# Altium PCB Buttons.PcbDoc
Units mm, origin at the board's own origin, x right, y up, seen from the top; angles counter-clockwise.
Board outline 72.34 x 20.68 mm, 2 copper layers (Top Layer, Bottom Layer); 13 components, 6 nets, 38 pads, 0 vias.
Unrouted connection lines stored in the file: 2.
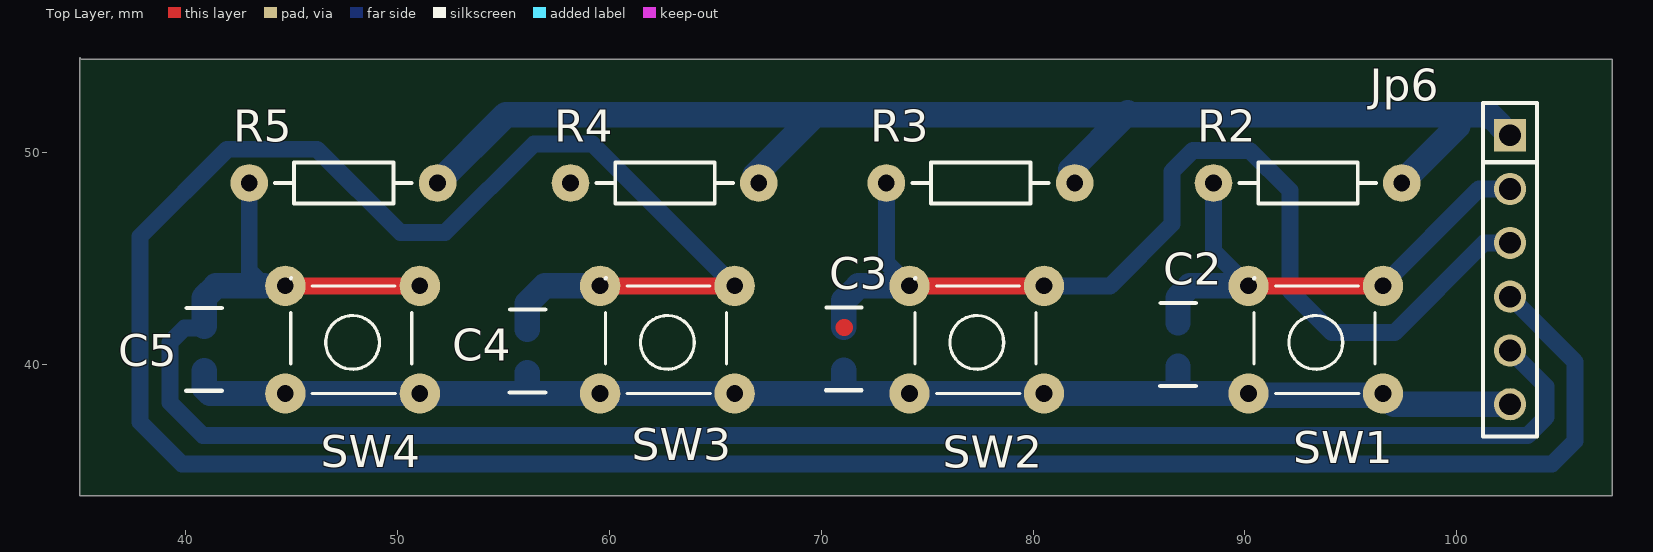
[diagram p0: Top Layer view]
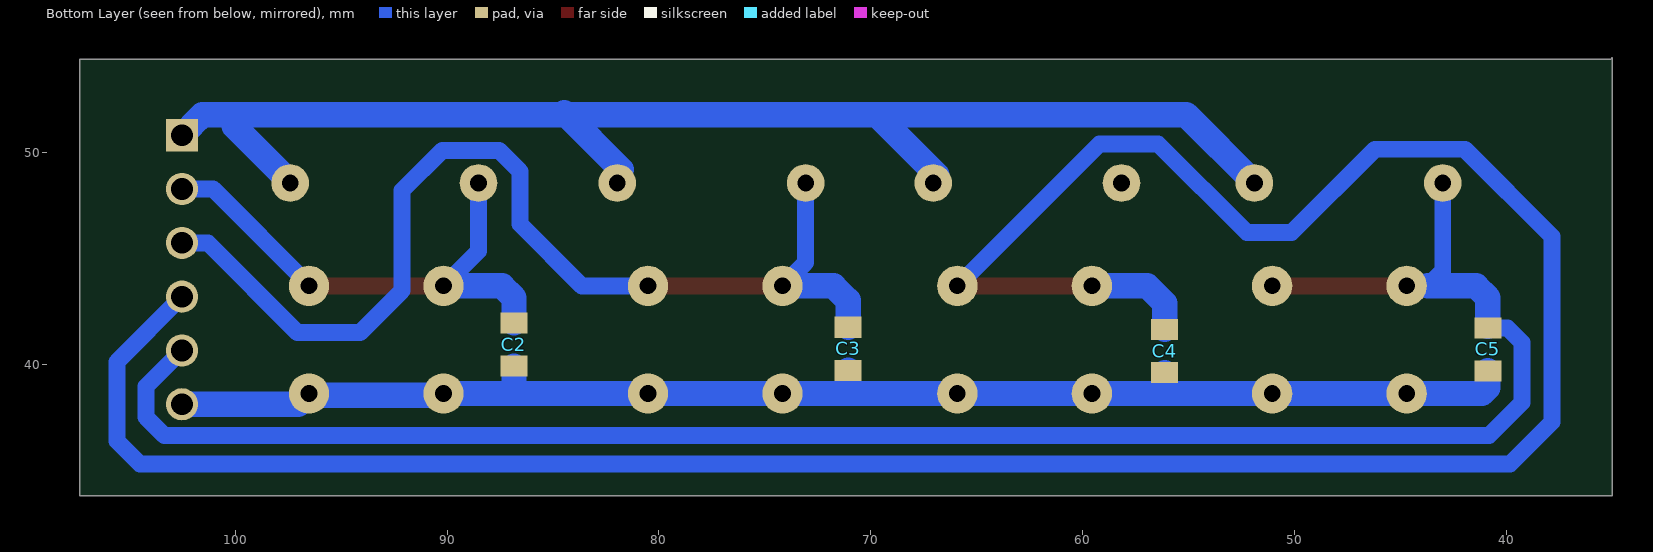
[diagram p1: Bottom Layer view, seen from below]
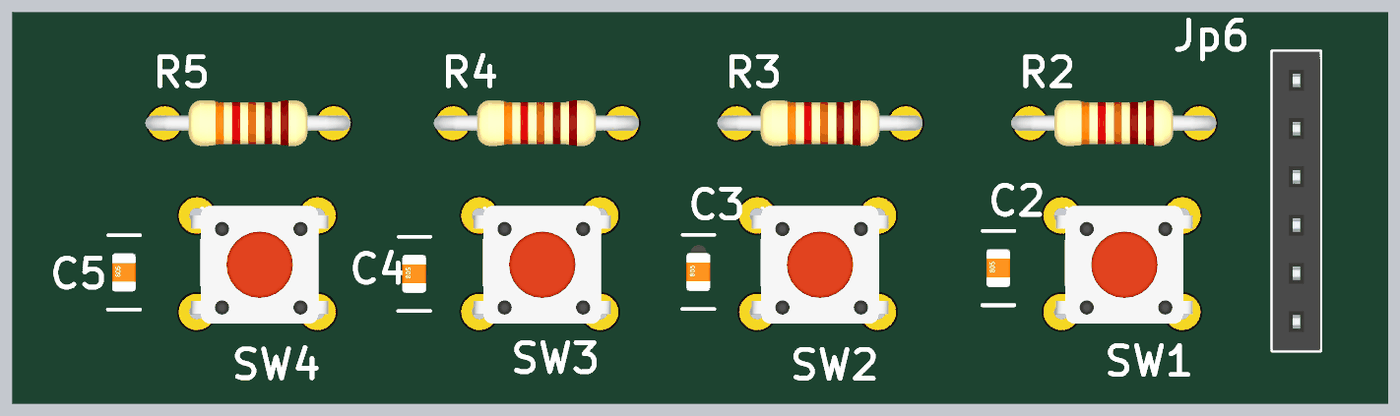
[diagram p2: 3D render of the assembled board from above, using the file's embedded part models]

## Layer stack, top to bottom
Top Solder: solder mask 0.0102, Solder Resist, Dk 3.5
Top Layer: signal copper 0.0356
Dielectric 1: dielectric 0.32, FR-4, Dk 4.8
Bottom Layer: signal copper 0.0356
Bottom Solder: solder mask 0.0102, Solder Resist, Dk 3.5

## Board outline
35.001,54.458 35.077,54.381 107.34,54.381 107.34,33.782 35.001,33.782

## Design rules (kind name [scope] priority, off if disabled: settings)
Clearance [All] p1: gap=0.254
PolygonConnect [All] p1: connectstyle=Relief reliefconductorwidth=0.254 reliefentries=4 polygonreliefangle="90 Angle" airgapwidth=0.254
RoutingVias [All] p1: holewidth=0.711 width=1.27 viastyle="Through Hole" minholewidth=0.711 minwidth=1.27 maxholewidth=0.711 maxwidth=1.27
SolderMaskExpansion [All] p1: expansion=0.102
Width [All] p1: maxlimit=1.2 minlimit=0.6 preferedwidth=0.8
30 further rules are at their usual default settings.

## Components (designator, comment, footprint, x,y, rotation, side; value= is the part's Value field where it differs from the comment)
C2 "Capacitor Ceramic" C0805 86.843,40.919 r90 top
C3 "Capacitor Ceramic" C0805 71.069,40.716 r90 top
C4 "Capacitor Ceramic" C0805 56.134,40.615 r90 top
C5 "Capacitor Ceramic" C0805 40.869,40.691 r90 top
Jp6 "JP6" JP6-C1T 102.514,50.8 r270 top
R2 "1k" R1/4W 88.519,48.547 r0 top
R3 "1k" R1/4W 73.076,48.547 r0 top
R4 "1k" R1/4W 58.166,48.547 r0 top
R5 "1k" R1/4W 43.002,48.547 r0 top
SW1 "SW" SW4 96.52,38.608 r180 top
SW2 "SW" SW4 80.518,38.608 r180 top
SW3 "SW" SW4 65.913,38.608 r180 top
SW4 "SW" SW4 51.054,38.608 r180 top

## Footprints (in the part's own frame and the unit in brackets; to place one, negate y for a bottom-side part, rotate by r counter-clockwise, add the part's x,y. Pads: shape width x height; smd on the part's side, far side on the other; paste and mask are expansions set on the pad)
C0805 [mm] "Chip Resistor; Body 2.0 x 1.3 mm (LxW typ)"
  rect 1x1.27 smd far side: 1(-1.016,0) 2(1.016,0)
  silkscreen extent -1.96,-0.84 1.96,0.84, body extent -1,-0.62 1,0.63, height 0.78
JP6-C1T [mm] "6 row, straight, gold plating"
  rect 1.52x1.52 hole 1.02: 1(0,0)
  round 1.52 hole 1.02: 2(2.54,0) 3(5.08,0) 4(7.62,0) 5(10.16,0) 6(12.7,0)
  silkscreen extent -1.52,-1.27 14.22,1.27, body extent -1.52,-1.25 14.22,1.25, height 8.51
R1/4W [mil] "R 1/4W, 2 Pin, 350mil"
  round 70 hole 31: 1(0,0) 2(350,0)
  silkscreen extent 48,-38 302,38, body extent -40,-47 386,47, height 111
SW4 [mil] "SW button 4pin, 250 x250 mil"
  round 75 hole 31: 1(0,0) 2(250,-200) 3(250,0) 4(0,-200)
  silkscreen extent 15,-215 240,0, body extent -36,-220 276,24, height 276

## Part data
C2 C3 C4 C5: library part CapSMD, "Capacitor"
Jp6: "WR-PHD 2.54 mm Angled Socket Header"
R2 R3 R4 R5: library part R1/4W, "Resistor 1/4W"
SW1 SW2 SW3 SW4: library part SW4, "Switch button 4 pin"

## Nets (pads, with @x,y where several pads share a name; then routed paths per layer and width w, separated by ;. In a path a pad name is that pad's centre, name@x,y a point inside that pad or via, vN(x,y) a via of type N, cw(c..) or ccw(c..) an arc to the next point about the centre after c; other vN are vias at no path point)
GND: C2.1 C3.1 C4.1 C5.1 Jp6.6 SW1.1 SW1.3 SW2.1 SW2.3 SW3.1 SW3.3 SW4.1 SW4.3 | length 65.8
  Bottom Layer w1.2: C5.1 40.869,38.887 41.148,38.608 SW4.3 SW4.1 SW3.3 SW3.1 70.942,38.608 ; 56.134,38.76 C4.1 ; C3.1 71.069,38.735 70.942,38.608 ; C2.1 86.843,38.684 86.766,38.608 ; SW1.3 86.766,38.608 ; SW1.3@90.475,38.532 96.825,38.532 97.028,38.1 Jp6.6 ; 70.942,38.608 SW2.3 SW2.1 86.766,38.608
NetC2_2: C2.2 Jp6.2 R2.1 SW1.2 SW1.4 | length 24.6
  Top Layer w0.8: SW1.2 SW1.4
  Bottom Layer w0.8: R2.1 88.519,45.339 SW1.2 ; SW1.4 96.52,43.739 101.041,48.26 Jp6.2
  Bottom Layer w1.2: C2.2 86.843,43.129 87.401,43.688 SW1.2
NetC3_2: C3.2 Jp6.3 R3.1 SW2.2 SW2.4 | length 50.5
  Top Layer w0.8: 71.069,41.732 71.095,41.732 ; SW2.2 SW2.4
  Bottom Layer w0.8: R3.1 73.076,44.78 SW2.2 ; SW2.4 83.642,43.688 86.563,46.609 86.563,49.098 87.555,50.09 90.22,50.09 92.126,48.184 92.126,43.459 94.107,41.478 97.053,41.478 101.295,45.72 Jp6.3
  Bottom Layer w1.2: C3.2 71.069,43.002 71.755,43.688 SW2.2
NetC4_2: C4.2 Jp6.4 R4.1 SW3.2 SW3.4 | length 133.1
  Top Layer w0.8: SW3.2 SW3.4
  Bottom Layer w0.8: SW3.4 59.207,50.394 56.439,50.394 52.248,46.203 50.14,46.203 46.203,50.14 41.961,50.14 37.846,46.025 37.846,37.262 39.827,35.281 104.496,35.281 105.588,36.373 105.588,40.107 Jp6.4
  Bottom Layer w1.2: C4.2 56.134,42.875 56.947,43.688 SW3.2
NetC5_2: C5.2 Jp6.5 R5.1 SW4.2 SW4.4 | length 90.5
  Top Layer w0.8: SW4.2 SW4.4
  Bottom Layer w0.6: C5.2 C5.2@40.869,41.783
  Bottom Layer w0.8: C5.2 39.954,41.707 39.268,41.021 39.268,38.176 40.818,36.627 103.353,36.627 104.216,37.49 104.216,38.938 Jp6.5 ; R5.1 43.002,44.399 43.713,43.688
  Bottom Layer w1.2: C5.2@40.869,41.783 40.869,43.129 41.427,43.688 43.713,43.688
VCC: Jp6.1 R2.2 R3.2 R4.2 R5.2 | length 62.9
  Bottom Layer w1.2: R5.2 55.111,51.765 101.549,51.765 Jp6.1@102.083,51.232 ; R4.2@66.878,48.928 69.444,51.493 ; R3.2@81.788,49.182 84.473,51.867 ; R2.2 97.409,48.59 100.051,51.232